# Altium PCB ESP32_USB_C.PcbDoc (part 3 of 3)
Units mil, origin at the board's own origin, x right, y up, seen from the top; angles counter-clockwise.
Board outline 2700 x 1000 mil, 4 copper layers (L1, L2, L3, L4), stack 61.605 mil thick; 61 components, 73 nets, 293 pads, 151 vias.
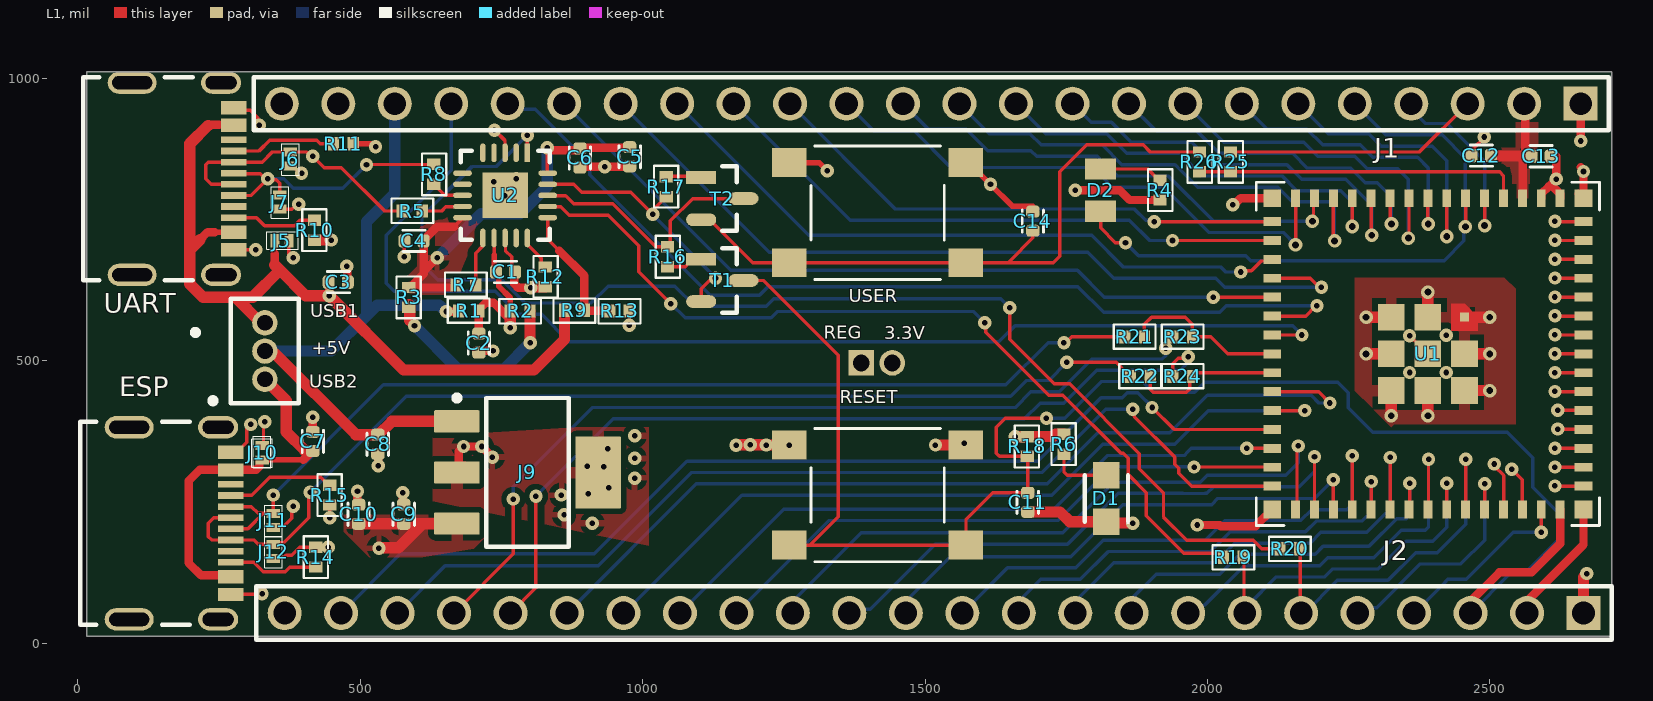
[diagram p0: L1 view]

## Part data (continued)
U1: "WiFi-Module 802.11 2, 4GHz 150Mb/s", Manufacturer="Espressif Systems", Supplier Part Number=1965-ESP32-S3-MINI-1U-N8CT-ND, Category="RF Transceiver Modules and Modems", ComponentLink1Description=https://datasheet.octopart.com:443/ESP32-S3-MINI-1U-N8-Espressif-Systems-datasheet-188867343.pdf?src-supplier=TME, ComponentLink1URL=https://datasheet.octopart.com:443/ESP32-S3-MINI-1U-N8-Espressif-Systems-datasheet-188867343.pdf?src-supplier=TME, ComponentLink2Description=https://datasheet.octopart.com:443/ESP32-S3-MINI-1U-N8-Espressif-Systems-datasheet-165560562.pdf?src-supplier=TME, ComponentLink2URL=https://datasheet.octopart.com:443/ESP32-S3-MINI-1U-N8-Espressif-Systems-datasheet-165560562.pdf?src-supplier=TME, ComponentLink3Description=https://datasheet.octopart.com:443/ESP32-S3-MINI-1U-N8-Espressif-Systems-datasheet-165560559.pdf?src-supplier=TME, ComponentLink3URL=https://datasheet.octopart.com:443/ESP32-S3-MINI-1U-N8-Espressif-Systems-datasheet-165560559.pdf?src-supplier=TME, Manufacturer Part Number=ESP32-S3-MINI-1U-N8, Pricing="1=5.43, 10=4.703, 25=4.4492, 100=4.0995, 250=3.89008 (USD)", Stock=744, Supplier=DigiKey
U2: library part "FT231XQ-R Tape & Reel (TR) 2006 UART USB 2.0 interface controller 3.3V~5V 4mm 8mA 12Mbps UART Interface ICs Tape & Reel (TR) 2006 UART USB 2.0 interface controller 3.3V~5V 4mm 8mA 12Mbps"
USB1: "Pin Header, Board-to-Board, Wire-to-Board, 3.4 A, 1.27 mm, 1 Rows, 3 Contacts, Through Hole", Manufacturer=Samtec, Manufacturer Lifecycle Status=PRODUCTION, Supplier Part Number=612-FTS-103-01-F-S-ND, Category="Board to Board Connectors", ComponentLink1Description=https://datasheet.octopart.com:443/FTS-103-01-F-S-Samtec-datasheet-97029283.pdf?src-supplier=Newark, ComponentLink1URL=https://datasheet.octopart.com:443/FTS-103-01-F-S-Samtec-datasheet-97029283.pdf?src-supplier=Newark, ComponentLink2Description=https://datasheet.octopart.com:443/FTS-103-01-F-S-Samtec-datasheet-165596534.pdf?src-supplier=Newark, ComponentLink2URL=https://datasheet.octopart.com:443/FTS-103-01-F-S-Samtec-datasheet-165596534.pdf?src-supplier=Newark, ComponentLink3Description=https://sigma.octopart.com:443/97029285/technical_drawing/Samtec-FTS-103-01-F-S.pdf?src-supplier=element14+APAC, ComponentLink3URL=https://sigma.octopart.com:443/97029285/technical_drawing/Samtec-FTS-103-01-F-S.pdf?src-supplier=element14+APAC, ComponentLink4Description=https://datasheet.octopart.com:443/FTS-103-01-F-S-Samtec-datasheet-118493358.pdf?src-supplier=Electro+Sonic, ComponentLink4URL=https://datasheet.octopart.com:443/FTS-103-01-F-S-Samtec-datasheet-118493358.pdf?src-supplier=Electro+Sonic, ComponentLink5Description=https://datasheet.octopart.com:443/FTS-103-01-F-S-Samtec-datasheet-176663378.pdf?src-supplier=Toby+Electronics, ComponentLink5URL=https://datasheet.octopart.com:443/FTS-103-01-F-S-Samtec-datasheet-176663378.pdf?src-supplier=Toby+Electronics, ComponentLink6Description=https://datasheet.octopart.com:443/FTS-103-01-F-S-Samtec-datasheet-116535195.pdf?src-supplier=Toby+Electronics, ComponentLink6URL=https://datasheet.octopart.com:443/FTS-103-01-F-S-Samtec-datasheet-116535195.pdf?src-supplier=Toby+Electronics, ComponentLink7Description=https://datasheet.octopart.com:443/FTS-103-01-F-S-Samtec-datasheet-136395376.pdf?src-supplier=Toby+Electronics, ComponentLink7URL=https://datasheet.octopart.com:443/FTS-103-01-F-S-Samtec-datasheet-136395376.pdf?src-supplier=Toby+Electronics, ComponentLink8Description=https://datasheet.octopart.com:443/FTS-103-01-F-S-Samtec-datasheet-151470456.pdf?src-supplier=Sager+Electronics, ComponentLink8URL=https://datasheet.octopart.com:443/FTS-103-01-F-S-Samtec-datasheet-151470456.pdf?src-supplier=Sager+Electronics, Contact Plating=Gold, Gender=Male, Lifecycle Status=Production, Manufacturer Part Number=FTS-103-01-F-S, Mounting Technology="Through Hole", Number of Contacts=3, Number of Rows=1, Packaging=Bulk, Pitch=1.27mm, Pricing="1=0.73, 50=0.638, 100=0.541, 500=0.449, 1000=0.384, 2000=0.314, 5000=0.295 (USD)", Radiation Hardening=No, RoHS=Compliant, Stock=835, Supplier=DigiKey, Termination=Solder

## Via types
v1: diameter 23.62, hole 9.84, L1 to L4, tented both sides, 129 vias
v2: diameter 24, hole 12, L1 to L4, tented both sides, 19 vias
v3: diameter 23.62/23.62/23.62 (per signal layer), hole 9.84, L1 to L4, tented both sides, 2 vias
v4: diameter 23.62, hole 9.84, L1 to L4, 1 vias

## Nets (pads, with @x,y where several pads share a name; then routed paths per layer and width w, separated by ;. In a path a pad name is that pad's centre, name@x,y a point inside that pad or via, vN(x,y) a via of type N, cw(c..) or ccw(c..) an arc to the next point about the centre after c; other vN are vias at no path point)
+3V3: 3.3V.2 C12.2 C13.2 J1.2 J2.1 R2.1 R3.1 R4.2 R6.2 R18.2 U1.3 | length 4002.5
  L1 w15: v1(1766,802) 1844.61,802 1862.13,784.48 R4.2 ; U1.3 2558.11,787.96 2558.11,855.76 ; J1.2 2562.67,953.33 2562.67,863.67
  L1 w20: R3.1@586,599.48 R3.1 587.77,594.48 587.81,594.44 587.81,571.17 596,562.98 v1(596,562) ; R2.1 800.56,587.96 800.56,532.44 v1(801,532) ; v1(1659.48,365.48) R18.2 R18.2 1727.51,365.52 1731.47,369.48 R6.2 R6.2 ; 2515.5,862.5 C13.2@2563.85,862.5 ; J2.1 2666,117 v1(2672,123)
  L2 w15: J1.2 J1.2@2561.84,954.16
  L2 w20: 2557.13,902.95 2583.6,876.48 2583.6,264.95 2672,176.55 v1(2672,123)
  L2 w40: v1(801,532) 822.52,553.52 880.77,553.52 913.58,520.71 1099.71,520.71 1127.64,548.64 1408.8,548.64 1440.99,516.45 1440.99,497.01 3.3V.2 1504.5,433.5 1591.47,433.5 v1(1659.48,365.48) ; 3.3V.2@1461.01,497.01 v1(1766,802) 1818.19,854.19 2508.36,854.19 2557.13,902.95 J1.2@2557.13,951.13
  L4 w20: v1(596,562) 672.61,485.39 754.39,485.39 v1(801,532)
"+3V3 FTDI": C4.2 C5.2 C6.2 R3.2 R7.1 U2.10 U2.20 | length 798.6
  L1 w6: 666.52,737.52 681,752 U2.10 ; v1(831,877) 831,832.83 U2.20
  L1 w15: R3.2 R3.2@587.77,629.52 ; v1(636,682) 611.93,657.93 ; 666.52,737.52 636.27,737.52 611.93,713.18 C4.2 611.93,657.93 ; R7.1@666.77,629.52 R3.2@587.77,629.52 ; v1(831,877) 835.2,872.8 C6.2@885.87,872.8 ; C6.2@890,876.93 C5.2@976,876.93 ; R3.2@587.77,629.52 611.93,653.68 611.93,657.93
  L4 w20: v1(636,682) 714.19,760.19 782.47,760.19 831,808.72 v1(831,877)
+3V3_REG: 3.3V.1 C9.2 C10.2 J9.3 | length 1260.3
  L1 w20: C10.2 C9.2 577.19,211.26 610,211.26 ; v1(533,168) 533.69,168.69 567.43,168.69 610,211.26 ; J9.3 670.81,211.26 610,211.26
  L2 w40: v1(533,168) 926.13,168 952.81,194.68 952.81,196.94 1177.87,422 1313,422 3.3V.1
+5V: C8.2 J1.22 J9.1 R1.1 USB1.2 | length 1192.9
  L1 w15: v1(652,587) R1.1@672.48,587 ; R1.1@671.94,588 672.48,587.46 R1.1@672.48,587 ; R1.1 R1.1@673.48,587 ; R1.1@672.48,587 672.48,586 R1.1@673.48,587 ; R1.1@672.48,587 R1.1@673.48,587
  L1 w20: USB1.2 335.78,512.22 348.77,512.22 492.06,368.93 C8.2 532.18,368.93 555.8,392.55 J9.1
  L4 w20: USB1.2 448.39,517 511,579.61 ; J1.22 561,796.06 511,746.06 511,579.61 ; v1(652,587) 651.02,587 640.02,598 529.39,598 511,579.61
+5V_VBUS1: C3.2 J5.2 R9.2 UART.A4B9 UART.B4A9 USB1.1 | length 1414.1
  L1 w6: J5.2@347.25,710.75 J5.2 348.5,689.5
  L1 w10: 242.41,727.59 UART.B4A9 ; 250,918 UART.A4B9@274.68,918
  L1 w15: 216,714 229.59,727.59 242.41,727.59 ; 232,918 250,918 ; 348.5,669.51 348.5,689.5 ; C3.2 445,638.07 v1(445,615)
  L1 w20: 216,714 198.05,696.05 ; 230.57,916.57 198.05,884.05 198.05,696.05 ; USB1.1@324.24,567 278.92,612.31 ; 348.5,669.51 357.57,660.44 ; R9.2 861.48,537.48 807.44,483.44 576.56,483.44 v1(445,615) 403.01,615 357.57,660.44 ; 198.05,696.05 198.05,635.56 221.29,612.31 278.92,612.31 ; 278.92,612.31 309.45,612.31 357.57,660.44
+5V_VBUS2: C7.2 ESP.A4B9 ESP.B4A9 J10.2 USB1.3 | length 644.1
  L1 w10: J10.2 399.25,324.5
  L1 w15: ESP.B4A9 268.66,119.7 218.3,119.7 196,142 196,287 215.49,306.49 ESP.A4B9 315.49,306.49 321.52,312.52 J10.2@321.52,324.03 ; 399.25,324.5 414.82,340.07 C7.2
  L1 w20: USB1.3 368.79,429.21 368.79,373.71 401.8,340.7 415.37,340.7 C7.2
"+VCC FTDI": C1.2 C2.2 R1.2 R2.2 U2.12 | length 260.3
  L1 w6: 737.04,687 U2.12@737.04,708.19
  L1 w10: 737.04,687 737.04,660.03 C1.2 745.31,651.76 745.31,631.62 765.52,611.41 R2.2
  L1 w15: R1.2@709.52,589.77 722.49,602.74 736,602.74 765.52,573.22 ; R1.2@709.76,587.76 709.76,548.17 C2.2
  L1 w20: v1(765.52,558.48) 765.52,573.22
"BTN GPI00": C14.2 R26.1 T2.2 USER.1 USER.2 | length 1157.3
  L1 w6: T2.2 1119.03,749.6 1195.21,673.42 USER.2 USER.1 1649.96,673.42 ; C14.2@1691,720.35 1691,717.47 1649.96,676.43 1649.96,673.42 ; R26.1 1898.83,869.52 1886.35,882 1786.13,882 1738.56,834.44 1738.56,684.56 1727.42,673.42 1649.96,673.42
CHIP_PU: C11.2 J2.3 R18.1 RESET.1 RESET.2 T1.3 U1.45 | length 2950.6
  L1 w6: T1.3 1213.61,642 1346,509.61 1346,223.42 1296,173.42 ; RESET.2 1296,173.42 ; v1(1715,398) 1642,398 1626,382 1626,336.34 1631.86,330.48 R18.1 1682,329.48 C11.2 1619.93,265.93 1572.5,218.5 RESET.1 1296,173.42
  L1 w15: J2.3@2458,66 2517.16,125.16 2574.16,125.16 2624.66,175.66 U1.45
  L4 w6: v1(1715,398) 1747.29,398 1791.41,442.12 1812.29,463 1885.2,463 1904.39,443.81 1977.24,443.81 1995.43,462 2231,462 2249.58,443.42 2249.58,416.42 2292.91,373.09 2531.12,373.09 2576,328.21 2576,276.08 2620.51,231.58 2620.51,181.51 2562.33,123.33 2536.33,123.33 J2.3
"CON1 USB N": J6.2 R5.1 UART.A7 UART.B7 | length 480.5
  L1 w6: UART.A7 235.76,812.24 226,822 226,847 230.61,851.61 UART.B7 276.43,851.29 326.03,851.29 344.24,869.5 J6.2 404.81,869.5 412.31,862 v1(416,862) 436.29,841.71 466.29,841.71 543,765 R5.1
"CON1 USB P": J7.2 R8.1 UART.A6 UART.B6 | length 493
  L1 w6: UART.B6 306.55,792.55 v1(336,822) ; UART.A6@276.75,831.29 323.02,831.29 v1@332.31,822 ; v1@337.79,820.21 351.39,820.21 357.25,814.35 J7.2 ; v1(511,847) 511.26,847.26 629.74,847.26 R8.1
  L4 w6: v1(336,822) 364.44,822 381.25,805.19 469.19,805.19 v1(511,847)
"CON2 USB N": ESP.A7 ESP.B7 J11.2 R21.1 | length 1805.1
  L1 w6: ESP.A7 301.16,202.16 328.5,229.5 ; ESP.B7 306.99,241.53 319.02,229.5 328.5,229.5 ; v1(346,262) J11.2 328.5,229.5 ; v1(1746,532) 1749.69,532 1759.69,542 R21.1
  L4 w6: v1(346,262) 541,457 1643.14,457 1718.14,532 v1(1746,532)
"CON2 USB P": ESP.A6 ESP.B6 J12.2 R22.1 | length 1876
  L1 w6: ESP.A6 240.77,221.84 231,212.07 231,188.33 236.86,182.47 ESP.B6 311.25,182.47 319.02,174.7 345.8,174.7 J12.2 348.87,177.37 364.29,177.37 408.39,221.48 408.39,264.39 v1(411,267) ; v1(1751,497) 1838.48,497 1856.67,478.81 1858.44,478.81 1863.48,473.77 R22.1
  L4 w6: v1(411,267) 581,437 1651.43,437 1679.24,464.81 1718.81,464.81 v1(1751,497)
"CON  GPI00": J1.3 R25.1 | length 461.6
  L1 w6: R25.1 2375.52,869.52 J1.3 J1.3@2461,948.85
"CON ESP USB N": J2.21 R23.1 | length 1556.8
  L1 w6: J2.21 771,158 v1(771,254.92) ; v1(1926,522) 1926,527.75 1938.48,540.23 R23.1
  L4 w6: v1(771,254.92) 771,277 911,417 1659.71,417 1687.52,444.81 1737.54,444.81 1795.73,503 1920.14,503 1926,508.86 v1(1926,522)
"CON ESP USB P": J2.20 R24.1 | length 1544
  L1 w6: J2.20 811,98 v1(811,259.92) ; R24.1 1938.48,494.52 1948.35,504.39 1963.39,504.39 v1(1966,507)
  L4 w6: v1(811,259.92) 948.08,397 1676.08,397 1703.89,424.81 1745.82,424.81 1804.01,483 1807,483 1952,483 1963.39,494.39 1963.39,504.39 v1(1966,507)
"DTR FTDI": R16.1 T2.3 U2.18 | length 443.8
  L1 w6: U2.18@831.83,792.4 831.83,792.31 863.4,792.31 878.1,777.62 947.38,777.62 1023.05,701.95 1043.57,701.95 R16.1 1049,706.52 1049,747.61 1088.39,787 T2.3
"ESP USB N": R21.2 R23.2 U1.23 | length 294.1
  L1 w6: R21.2 1888.52,564.52 1901,577 1961,577 1973.52,564.48 R23.2 2006,542 2036,512 U1.23
"ESP USB P": R22.2 R24.2 U1.24 | length 257.8
  L1 w6: R22.2 1898.52,449.67 1904.38,443.81 1962.62,443.81 1968.48,449.67 R24.2@1968.48,466.96 ; R24.2@1973.52,473.5 1978.56,478.54 U1.24
"FTDI USB N": R5.2 U2.9 | length 75
  L1 w6: R5.2 643.96,765 651.59,772.63 681,772.63 U2.9
"FTDI USB P": R8.2 U2.8 | length 60.3
  L1 w6: R8.2 631.77,812.48 636.81,807.44 636.81,805.67 649.85,792.63 U2.8
GND: C1.1 C2.1 C3.1 C4.1 C5.1 C6.1 C7.1 C8.1 C9.1 C10.1 C11.1 C12.1 C13.1 C14.1 D1.1 ESP.A1B12 ESP.B1A12 ESP.S1 ESP.S2 ESP.S3 ESP.S4 J1.1 J1.23 J2.2 J2.24 J5.1 J6.1 J7.1 J9.2 J9.4 J10.1 J11.1 J12.1 R10.1 R11.1 R12.2 R13.1 R14.1 R15.1 RESET.3 RESET.4 U1.1 U1.2 U1.42 U1.43 U1.46 U1.47 U1.48 U1.49 U1.50 U1.51 U1.52 U1.53 U1.54 U1.55 U1.56 U1.57 U1.58 U1.59 U1.60 U1.61 U1.62 U1.63 U1.64 U1.65 U1.66 U1.67 U1.68 U1.69 U1.70 U1.71 U1.72 U1.73 U2.3 U2.13 U2.21 UART.A1B12 UART.B1A12 UART.S1 UART.S2 UART.S3 UART.S4 USER.3 USER.4 | length 3873.1
  L1 w6: ESP.B1A12 271.33,86.51 325.51,86.51 v1(326,87) ; ESP.A1B12 281.67,337.98 299.02,355.33 299.02,380.02 v1(306,387) ; UART.B1A12 v1(315.09,696.09) ; UART.A1B12 276.12,947.12 279.86,943.38 304.97,943.38 318.39,929.95 318.39,919.61 v1(321,917) ; J10.1 328.5,352 328.5,389.5 v1(331,392) ; J12.1 348.03,151.53 364.2,151.53 368.34,155.68 378.74,155.68 392.58,169.52 R14.1 v1(443.52,169.52) ; J11.1 348.03,206.53 364.2,206.53 378.39,220.73 378.39,239.39 v1(381,242) ; J7.1 378.85,768.25 387.6,777 v3(391,777) ; J5.1 373.5,689.5 v1(381,682) ; J6.1 380.02,844.5 392.52,832 v1(396,832) ; v1(446,222) R15.1 ; v1(578.07,684.07) C4.1 ; v1@737,908 v1(737.5,908) 738,908 756.19,889.81 756.19,868.27 U2.3 ; U2.13 757.04,717.22 757.04,694.82 768.05,683.81 768.05,658.81 C1.1@772.99,653.87 ; v1(976.52,562.52) R13.1 ; v1(2358,544) 2358.41,544 U1.61 ; C12.1@2470.91,867.02 2471.2,867.31 2471.2,876.16 2490,894.96 v1(2490,896) ; v1(2508,317) 2508,313.31 2524.63,296.68 U1.42@2524.63,231.42 ; v1(2539,308) 2539,307.55 2557.73,288.82 U1.43 2557.73,235.58 U1.43@2557.08,234.92 ; U1.2 U1.2@2591.6,787.19 ; v1@2615.78,277.76 U1.46@2665.99,277.76 ; v1@2615.78,311.22 U1.47 ; v1@2615.78,344.69 U1.48 ; v1@2615.78,445.08 U1.51 ; v1@2615.78,478.55 U1.52 ; v1@2615.78,512.01 U1.53 ; v1@2615.78,545.48 U1.54 ; v1@2615.78,578.94 U1.55 ; v1@2615.78,612.41 U1.56 ; v1@2615.78,645.87 U1.57 ; v1@2615.78,679.33 U1.58 ; v1@2615.78,712.8 U1.59 ; v1@2615.78,746.26 U1.60 ; v1@2620.78,378.51 U1.49@2670.99,378.51 ; v1@2620.78,411.97 U1.50@2670.99,411.97
  L1 w10: R11.1 518.31,884 523.31,879 v4(527,879) ; USER.4 1312.42,850.58 v1(1327,836) ; USER.3 1577.42,850.58 v1(1615.88,812.12) 1654.35,773.65 C14.1@1691,773.65
  L1 w15: C7.1 v1(416,400) ; v1(476,667) 476.96,666.04 476.96,639.96 C3.1 ; v1(495,269) 495,246.93 C10.1 ; C8.1 532,334.07 v1(532,314) ; v1(575,266) 575,246.93 C9.1 ; J9.2 672.81,302 685,314.19 674,314.19 674,339.21 v1(682.79,348) v1(715,348) v1(734,329) ; C2.1 706.87,517.2 v1(735,517.2) ; C1.1@772.99,653.87 772.99,635.76 779.75,629 v1(802,629) ; C6.1 890,843.07 v1(933,843.07) 976,843.07 C5.1 ; v1(1981.91,209) 2021.72,209 2023.72,207 2085.41,207 U1.64 ; v1(2045,776) 2047.33,776 2058.92,787.59 U1.63 ; J2.2@2558,66 2666,174 U1.65 ; U1.2 2591.2,795.46 2591.57,795.84 2591.95,795.84 2604.8,808.69 ; C13.1@2617.65,862 v1(2617.65,821.54) 2604.8,808.69 ; U1.1 2624.66,795.46 2611.43,808.69 2604.8,808.69 ; U1.62@2657.75,795.84 U1.62 v1(2666,835) 2666,837.33 v1@2661,842.33 ; v1(2661,889) J1.1
  L1 w20: R10.1 R10.1 v1(448.52,713.52) ; v1@803.7,630.7 R12.2 R12.2 ; v1(1165.35,350.35) 1166.04,351.04 1186.96,351.04 1187.23,351.31 v1(1190.31,351.31) 1190.67,350.94 1217.7,350.94 1218.06,350.58 v1(1219.04,350.58) v1(1259.5,350.58) ; v1(1518.42,350.58) RESET.3 RESET.3@1566,357.08 ; C11.1@1687,232.07 1739.07,232.07 1756.48,214.66 D1.1 1822.97,212.69 1867.31,212.69 v1(1868,212) ; v2(2281,512) U1.72 ; v2(2281,576.96) U1.71 ; v2(2325.45,402.59) U1.73 ; v2(2390.41,402.59) U1.70 ; U1.69 v2(2390.41,621.41) ; U1.68 v2(2499.82,447.04) ; U1.67 v2(2499.82,512) ; U1.66 v2(2499.82,576.96)
  other v1: 911,212 861,227 856,262 904,264 940,275 2615.41,278.13 986,292 931,312 2615.41,311.59 902,313 986,327 938,344 2615.41,345.06 1569.25,353.83 986,367 2620.41,378.87 2620.41,412.34 2615.41,445.45 2358,479 2423,479 2615.41,478.91 2615.41,512.38 2423,545 2615.41,545.84 2615.41,579.31 2615.41,612.77 2615.41,646.24 2615.41,679.7 2615.41,713.17 2615.41,746.63 756,792 736,817 776,822
GPIO0: R25.2 R26.2 U1.4 | length 581.2
  L1 w6: R26.2 R25.2 2517.52,834.48 2524.27,827.73 U1.4
GPIO1: J1.4 U1.5 | length 340.3
  L1 w6: U1.5 2490.8,743.2 2491,743 2491,739.39 v2(2490.84,739.23)
  L4 w6: J1.4 2361,945 2386,920 2424,920 2490.84,853.16 v2(2490.84,739.23)
GPIO2: D2.1 J1.5 U1.6 | length 1145.9
  L1 w6: D2.1 1811,735 1837,709 v1(1855,709) ; v2(2456.91,736.99) 2457.34,737.42 U1.6
  L4 w6: v1(1855,709) 1878.02,685.98 1978.74,685.98 ; 1978.86,685.86 1978.74,685.98 ; J1.5 2316,900 2415.72,900 2456.91,858.8 v2(2456.91,736.99) 2454.23,734.32 2454.23,712.05 2419.18,677 2076.92,677 2068.06,685.86 2030.38,685.86 2030.26,685.98 1978.74,685.98
GPIO3: J1.6 U1.7 | length 506.6
  L1 w6: v2(2423.87,719.87) U1.7
  L4 w6: J1.6 2214,902 2285.72,902 2307.72,880 2398,880 2423.87,854.13 v2(2423.87,719.87)
GPIO4: J1.7 U1.8 | length 522.1
  L1 w6: U1.8 2390.41,742.59 v2(2391,742)
  L4 w6: J1.7 2106.12,909.88 2176,909.88 2203.88,882 2271,882 2293,860 2372.14,860 2391,841.14 v2(2391,742)
GPIO5: J1.8 U1.9 | length 625.6
  L1 w6: v2(2356,717) 2356.94,717.94 U1.9
  L4 w6: J1.8 2029,887 2170.6,887 2195.6,862 2261,862 2283,840 2337.14,840 2356,821.14 v2(2356,717)
GPIO6: J1.9 U1.10 | length 628
  L1 w6: U1.10 2323.48,744.52 v2(2326,742)
  L4 w6: J1.9 1909,907 1980.72,907 2020.72,867 2151,867 2176.91,841.09 2253.63,841.09 2279.54,815.18 2300.82,815.18 2326,790 v2(2326,742)
GPIO7: J1.10 U1.11 | length 723.8
  L1 w6: U1.11 2290.02,722.98 v2(2291,722)
  L4 w6: J1.10 1794,922 1830.19,922 1865.19,887 1972.43,887 2012.43,847 2141,847 2166.91,821.09 2245.34,821.09 2291,775.43 v2(2291,722)
GPIO8: J1.11 U1.12 | length 760.8
  L1 w6: v2(2256.55,737.55) U1.12
  L4 w6: J1.11 1714,902 1821.91,902 1856.91,867 1951,867 1991,827 2132.72,827 2158.63,801.09 2236,801.09 2256.55,780.54 v2(2256.55,737.55)
GPIO9: J1.12 U1.13 | length 878.3
  L1 w6: U1.13 2223.09,714.09 v2(2225.17,712)
  L4 w6: J1.12 1614,902 1685.72,902 1705.72,882 1813.62,882 1848.62,847 1942.72,847 1982.72,807 2124.43,807 2150.34,781.09 2219.32,781.09 2225.17,775.23 v2(2225.17,712)
GPIO10: J1.13 U1.14 | length 853.2
  L1 w6: v2(2186,747) 2187.81,748.81 2187.81,785.78 U1.14
  L4 w6: J1.13 1506.12,909.88 1573.12,909.88 1611,872 1687.43,872 1697.43,862 1805.34,862 1840.34,827 1931,827 2011,747 v2(2186,747)
GPIO11: J1.14 U1.15 | length 981.2
  L1 w6: v2(2156,705) 2156,707 2156.16,707.16 U1.15
  L4 w6: J1.14 1409,907 1480.72,907 1545.72,842 1797.06,842 1832.06,807 1922.72,807 2002.72,727 2134,727 v2(2156,705)
GPIO12: J1.15 U1.16 | length 940.5
  L1 w6: v1@1906.13,746.13 U1.16@2114.69,746.13
  L1 w15: v1(1906,746) v1@1906.13,746.13 ; U1.16@2114.69,746.13 U1.16
  L4 w6: J1.15 1447.45,768.55 1870.28,768.55 1890.46,748.37 1903.63,748.37 v1(1906,746)
GPIO13: J1.16 U1.17 | length 1054.1
  L1 w6: v1(1938.21,712.79) U1.17
  L4 w6: J1.16 1367.45,748.55 1862,748.55 1897.76,712.79 v1(1938.21,712.79)
GPIO14: J1.17 U1.18 | length 1186.5
  L1 w6: v1(2059,657) 2061.08,659.08 2078.08,659.08 2095.45,676.45 2111.94,676.45 U1.18
  L4 w6: J1.17 1294,722 1795,722 1851.14,665.86 2023.34,665.86 2032.19,657.01 v1(2059,657)
GPIO15: J1.18 U1.19 | length 1469.4
  L1 w6: U1.19 2114.89,645.93 2182.38,645.93 2198.31,630 v1(2202,630)
  L4 w6: J1.18 1224,692 1788,692 1834.14,645.86 2015.06,645.86 2030.92,630 v1(2202,630)
GPIO16: J1.19 U1.20 | length 1395.7
  L1 w6: v1(2010.61,612.39) U1.20
  L4 w6: J1.19 1156,660 1770,660 1817.61,612.39 v1(2010.61,612.39)
GPIO17: J1.20 U1.21 | length 1701.6
  L1 w6: U1.21 2174.15,578.93 2192.23,597 v1(2194,597)
  L4 w6: J1.20 770.61,945.39 810.02,945.39 817.88,937.53 817.88,937.14 843.14,911.88 843.53,911.88 906.19,849.22 906.19,829.53 1119.72,616 1206.92,616 1221.92,631 1770.72,631 1816.13,585.58 2021.71,585.58 2033.13,597 v1(2194,597)
GPIO18: J1.21 U1.22 | length 2101.2
  L1 w6: U1.22 v1(2167.46,545.46)
  L4 w6: J1.21 661,837 546,722 546,637 560,623 738.92,623 779.92,582 821,582 869.36,533.64 1630.95,533.64 1659.31,562 2150.93,562 v1(2167.46,545.46)
GPIO21: J2.19 U1.25 | length 1626.7
  L1 w6: U1.25 2196.93,445.07 v1(2217,425)
  L4 w6: J2.19 1095,282 1716.15,282 1806.15,372 1933.72,372 2000.13,438.42 2183.71,438.42 2197.13,425 v1(2217,425)
GPIO26: J2.18 U1.26 | length 1412.7
  L1 w6: U1.26 v1(2172.61,411.61)
  L4 w6: J2.18@966.4,52.6 1175.8,262 1724.43,262 1814.43,352 1942,352 2001.61,411.61 v1(2172.61,411.61)
GPIO33: J2.17 U1.28 | length 1169.6
  L1 w6: v1(2069.68,344.68) U1.28
  L4 w6: J2.17 1250,237 1727.72,237 1822.72,332 1958.87,332 1965.29,338.42 1965.42,338.42 1971.68,344.68 v1(2069.68,344.68)
GPIO34: J2.16 U1.29 | length 1056.4
  L1 w6: v1(1976.39,311.61) 2114.43,311.61 U1.29
  L4 w6: J2.16 1330,217 1736,217 1831,312 1976,312 v1(1976.39,311.61)
GPIO35: J2.15 U1.31 | length 1149.2
  L1 w6: U1.31@2156.08,239.92 2158.58,242.42 2158.58,346.58 v1(2161,349)
  L4 w6: J2.15@1258,66 1387.14,195.14 1744.01,195.14 1833.86,285 1965.08,285 1965.29,284.8 1987.5,284.8 1999.7,297 2139.14,297 2161,318.86 v1(2161,349)
GPIO36: J2.14 U1.32 | length 1046.8
  L1 w6: U1.32 v1(2189.62,329.59)
  L4 w6: J2.14 1372.9,59.9 1402.9,59.9 1518.14,175.14 1752.29,175.14 1842.15,265 1956.8,265 1957,264.8 1995.78,264.8 1995.99,265 1999.2,265 2011.2,277 2163.01,277 2189.62,303.62 v1(2189.62,329.59)
GPIO37: J2.13 U1.33 | length 904.6
  L1 w6: U1.33@2223.08,241.92 v1(2223.08,288.92)
  L4 w6: J2.13@1458,66 1545,153 1758.43,153 1850.43,245 1948.52,245 1948.72,244.8 2004.07,244.8 2004.27,245 2007.58,245 2018.58,256 2190.16,256 v1(2223.08,288.92)
GPIO38: J2.12 U1.34 | length 956.7
  L1 w6: U1.34@2256.62,238.41 v1(2256.62,331.59)
  L4 w6: J2.12@1558,66 1566.92,74.92 1572.44,69.41 1582.41,69.41 1646,133 1766.72,133 1815.72,182 1996.6,182 2031.6,217 2165.43,217 2184.43,236 2247,236 2256.62,245.62 v1(2256.62,331.59)
GPIO39: J2.11 U1.35 | length 801.5
  L1 w6: U1.35@2290.08,238.92 v1(2290.08,285.92)
  L4 w6: J2.11@1658,66 1705,113 1775,113 1824,162 2004.88,162 2034.88,192 2035.34,192 2040.34,197 2173.72,197 2192.72,216 2273.72,216 2290.08,232.36 v1(2290.08,285.92)
GPIO40: J2.10 U1.36 | length 820.9
  L1 w6: U1.36@2323.62,235.41 v1(2323.62,328.59)
  L4 w6: J2.10@1758,66 1834,142 2013.17,142 2014.17,143 2014.63,143 2048.63,177 2182,177 2201,196 2282,196 2323.62,237.62 v1(2323.62,328.59)
GPIO41: J2.9 U1.37 | length 673.2
  L1 w6: U1.37@2358.08,235.92 v1(2358.08,282.92)
  L4 w6: J2.9@1858,66 1858,70.83 1909.17,122 2021.91,122 2056.91,157 2190.6,157 2204.72,171.12 2286.17,171.12 2335.06,220 2352.22,220 2358.08,225.86 v1(2358.08,282.92)
GPIO42: J2.8 U1.38 | length 701.8
  L1 w6: U1.38@2391.62,232.41 v1(2391.62,325.59)
  L4 w6: J2.8 1979.59,53 1993.9,67.31 1995.5,67.31 2065.19,137 2198.88,137 2213,151.12 2294.46,151.12 2343.34,200 2385.76,200 2391.62,205.86 v1(2391.62,325.59)
GPIO45: J2.5 U1.41 | length 425.4
  L1 w6: U1.41@2491.08,234.92 v1(2491.08,281.92)
  L4 w6: J2.5 2275.61,62.61 2299.61,62.61 2377,140 2449,140 2491.08,182.08 v1(2491.08,281.92)
GPIO46: J2.4 U1.44 | length 324.8
  L1 w6: v1(2591.2,196.2) U1.44
  L4 w6: J2.4 2420,107 2420,107.14 2425.86,113 2458.16,113 2541.35,196.2 v1(2591.2,196.2)
GPIO47: J2.23 U1.27 | length 1837.8
  L1 w6: v1(1902,417) 1940.86,378.14 U1.27
  L4 w6: J2.23 571,158 914.43,158 1078.43,322 1699.58,322 1811.58,434 1849,434 1858,443 1876.92,443 1902,417.92 v1(1902,417)
GPIO48: J2.22 U1.30 | length 1773.5
  L1 w6: v1(1868,414) 1870.61,411.39 1870.61,401.04 1942.23,329.42 1942.23,316.77 1949.58,309.42 1949.58,300.5 1972.34,277.75 U1.30
  L4 w6: J2.22 650,137 921.72,137 1086.72,302 1707.86,302 1819.86,414 v1(1868,414)
NetD1_2: D1.2 R6.1 | length 108.7
  L1 w6: R6.1 1746,303.2 1751.86,297.34 D1.2
NetD2_2: D2.2 R4.1 | length 113.2
  L1 w6: D2.2 1894.35,839.4 1914.23,819.52 R4.1
NetJ3_A5: R11.2 UART.A5 | length 187
  L1 w6: UART.A5 320.57,871.29 339.75,890.47 422.62,890.47 429.09,884 R11.2
NetJ3_B5: R10.2 UART.B5 | length 152.7
  L1 w6: UART.B5 316.15,753.18 330.32,739.02 383.68,739.02 393.19,748.52 R10.2
NetJ4_A5: ESP.A5 R15.2 | length 194.6
  L1 w6: ESP.A5 271.16,261.53 298.7,261.53 307.61,261.53 339.89,293.81 429.94,293.81 444.23,279.52 R15.2
NetJ4_B5: ESP.B5 R14.2 | length 160.3
  L1 w6: ESP.B5 311.23,143.1 327.8,126.53 367.02,126.53 374.97,134.48 R14.2
NetR7_2: R7.2 U2.11 | length 88.4
  L1 w6: R7.2 704.52,690.52 717.04,703.04 U2.11
NetR12_1: R12.1 U2.15 | length 65.6
  L1 w6: U2.15 795.78,705.91 820.69,681.01 820.69,670.82 825.73,665.78 R12.1
NetR16_2: R16.2 T1.1 | length 64.9
  L1 w6: R16.2 1075.2,666.48 1088.12,679.4 T1.1
NetR17_2: R17.2 T2.1 | length 62.1
  L1 w6: R17.2@1043,828.04 1044.82,826.22 1101.76,826.22 T2.1
"RTS FTDI": R17.1 T1.2 U2.19 | length 469.4
  L1 w6: U2.19 877.94,812.31 892.08,798.17 978.83,798.17 v3@1014.26,762.74 ; v3(1018,759) v3@1014.26,762.74 ; R17.1 1040.23,790.48 1035.19,785.44 1035.19,783.67 1020.61,769.09 1020.61,765.29 1018.05,762.74 v3@1014.26,762.74 ; T1.2 1103.58,627.58 1119.39,643.39 1126.39,643.39 v1(1129,646)
  L4 w6: v3@1020.61,756.39 v3(1018,759) 1018,758 1129,647 v1(1129,646)
"RXD FTDI": R20.2 U2.1 | length 2198.8
  L1 w6: U2.1 795.78,879.8 795.89,879.91 795.89,898.89 v1(796,899) ; v1(1649.81,593.55) 1649.81,538.19 1729.14,458.86 1756.22,458.86 1879.62,335.46 1879.62,308.38 1922.23,265.77 1922.23,223.14 1963.18,182.19 2081.39,182.19 2096.58,167 R20.2
  L4 w6: v1(796,899) 740.81,843.81 697.81,843.81 609.19,755.19 609.19,670.89 637.08,643 750.08,643 790.89,602.19 909,602.19 938.81,632 1056.92,632 1092.92,596 1219,596 1232.4,609.4 1633.96,609.4 v1(1649.81,593.55)
"TXD FTDI": R19.2 U2.17 | length 1532.1
  L1 w6: U2.17 831.83,772.31 855.12,772.31 869.82,757.62 939.1,757.62 993.25,703.47 993.25,657.75 v1(1050,601) ; v1(1606,567) 1607.46,565.54 1607.46,550.54 1719.14,438.86 1744.14,438.86 1847.04,335.96 1850.84,335.96 1859.62,327.17 1859.62,298.38 1892,266 1892,225.08 1958.08,159 R19.2@2023.7,159
  L4 w6: v1(1050,601) 1075,576 1227.28,576 1238.28,587 1586,587 v1(1606,567)
U0RXD: J2.6 R20.1 U1.40 | length 680.3
  L1 w6: R20.1 2164.76,165.76 2164.76,54.24 J2.6 ; U1.40@2457.62,232.41 v1(2457.62,325.59)
  L4 w6: J2.6 2172,53 2230.12,111.12 2319.83,111.12 2368.72,160 2407.28,160 2457.62,210.34 v1(2457.62,325.59)
U0TXD: J2.7 R19.1 U1.39 | length 636.6
  L1 w6: R19.1 2064.76,150.76 2064.76,54.24 J2.7 J2.7@2065,53 ; U1.39@2424.08,235.92 v1(2424.08,282.92)
  L4 w6: J2.7@2071,66 2122,117 2207.72,117 2221.83,131.12 2302.74,131.12 2351.62,180 2399,180 2424.08,205.08 v1(2424.08,282.92)
"VBUS SENSE": R9.1 R13.2 U2.16 | length 236.4
  L1 w6: U2.16 831.83,715.17 852,695
  L1 w15: 852,695 896.52,650.48 R9.1 897.02,588.5 940.98,588.5 R13.2
pads on no net: ESP.A8 ESP.B8 J1.24 U2.2 U2.4 U2.5 U2.6 U2.7 U2.14 UART.A8 UART.B8

## Polygon pours and split planes (outlines as drawn)
+3V3_REG on L1 "+3V3_REG_L01_P008" (solid, pour order 8): 716,227 726,217 721,212 721,187 701,167 611,152 581,152 516,152 471,197 471,227
GND on L1 "GND_L01_P004" (solid, pour order 4): 2261,647 2261,447 2326,382 2331,387 2546,387 2546,627 2526,647
GND on L1 "GND_L01_P003" (solid, pour order 3): 1011,382 881,382 628.45,367 628.45,251.12 1011,172 1011,277
"+3V3 FTDI" on L1 "+3V3_FTDI_L01_P002" (solid, pour order 2): 571,647 571,622 576,617 681,617 681,647 676,652 681,667 711,737 711,752 706,752 691,767 671,767 661,757 661,752 656,757 606,737 601,722 601,667 581,647
+3V3 on L1 "+3V3_L01_P000" (solid, pour order 0): 2536.35,842.07 2541.36,772 2571,772 2571,847 2586,847 2586,922 2546,922 2546,877 2491,877 2491,850.89
GND on L2 "GND_L02_P009" (solid, pour order 9): 41,1007 36,1002 36,22 2701,22 2706,27 2706,1002
+3V3 on L2 "+3V3_L02_P005" (solid, pour order 5): 776,577 776,497 821,452 876,507 1326,507 1486,347 1706,347 1706,637 1866,797 2506,797 2526,817 2556,787 2556,177 2631,102 2711,102 2706,107 2706,872 2566,1012 1151,1012
GND on L3 (split plane): 2695.9,32.1 36.1,32.1 36.1,991.9 2695.9,991.9

## Silkscreen, mask and mechanical layers (free items; w line width, h text height)
Top Overlay:
  lines w2: 308,361 308,311 344,311 344,312 344,362 308,362
  text "REG" at 1320.76,530.44 h40
  text "+5V" at 413.79,503.44 h40
  text "USB2" at 409.62,444.44 h40
Bottom Overlay:
  text "+3V3" at 2547.44,890.5 h40 r270
  text "GND" at 2651.44,878.77 h40 r270
  text "GND" at 446.44,876.77 h40 r270
  text "IO10" at 1445.44,877.28 h40 r270
  text "IO14" at 1044.44,875.26 h40 r270
  text "IO13" at 1143.44,875.32 h40 r270
  text "IO12" at 1243.44,875.19 h40 r270
  text "IO17" at 742.44,873.32 h40 r270
  text "IO16" at 842.44,873.32 h40 r270
  text "IO15" at 942.44,873.41 h40 r270
  text "IO11" at 1343.44,872.84 h40 r270
  text "io18" at 648.44,866.86 h40 r270
  text "+5V" at 546.44,864.21 h40 r270
  text "IO2" at 2249.44,861.23 h40 r270
  text "IO5" at 1947.44,859.45 h40 r270
  text "IO4" at 2047.44,859.31 h40 r270
  text "IO3" at 2147.44,859.36 h40 r270
  text "IO0" at 2449.44,859.33 h40 r270
  text "NC" at 346.44,856.75 h40 r270
  text "IO6" at 1848.44,857.36 h40 r270
  text "IO1" at 2349.44,856.88 h40 r270
  text "IO9" at 1546.44,855.38 h40 r270
  text "IO8" at 1646.44,855.38 h40 r270
  text "IO7" at 1746.44,855.36 h40 r270
  text "GND" at 2547.44,213.85 h40 r270
  text "USB+" at 742.44,207.79 h40 r270
  text "GND" at 346.44,202.77 h40 r270
  text "IO37" at 1445.44,203.32 h40 r270
  text "USB-" at 648.44,201.79 h40 r270
  text "IO33" at 1044.44,201.32 h40 r270
  text "IO34" at 1143.44,201.26 h40 r270
  text "IO35" at 1243.44,201.41 h40 r270
  text "IO36" at 1343.44,201.32 h40 r270
  text "+3V3" at 2651.44,201.5 h40 r270
  text "IO26" at 942.44,199.32 h40 r270
  text "IO21" at 842.44,196.84 h40 r270
  text "IO45" at 2249.44,197.41 h40 r270
  text "IO47" at 446.44,195.32 h40 r270
  text "IO48" at 546.44,195.33 h40 r270
  text "IO42" at 1947.44,195.19 h40 r270
  text "IO46" at 2349.44,195.32 h40 r270
  text "RXD" at 2147,194.41 h40 r270
  text "TXD" at 2047,193.41 h40 r270
  text "IO38" at 1546.44,191.33 h40 r270
  text "IO39" at 1646.44,191.33 h40 r270
  text "IO40" at 1746.44,191.28 h40 r270
  text "IO41" at 1848.44,190.84 h40 r270
  text "EN" at 2449,187.42 h40 r270